# EAGLE board Titan_Servo_v1p01c (EAGLE 9.6.2), part 1 of 2
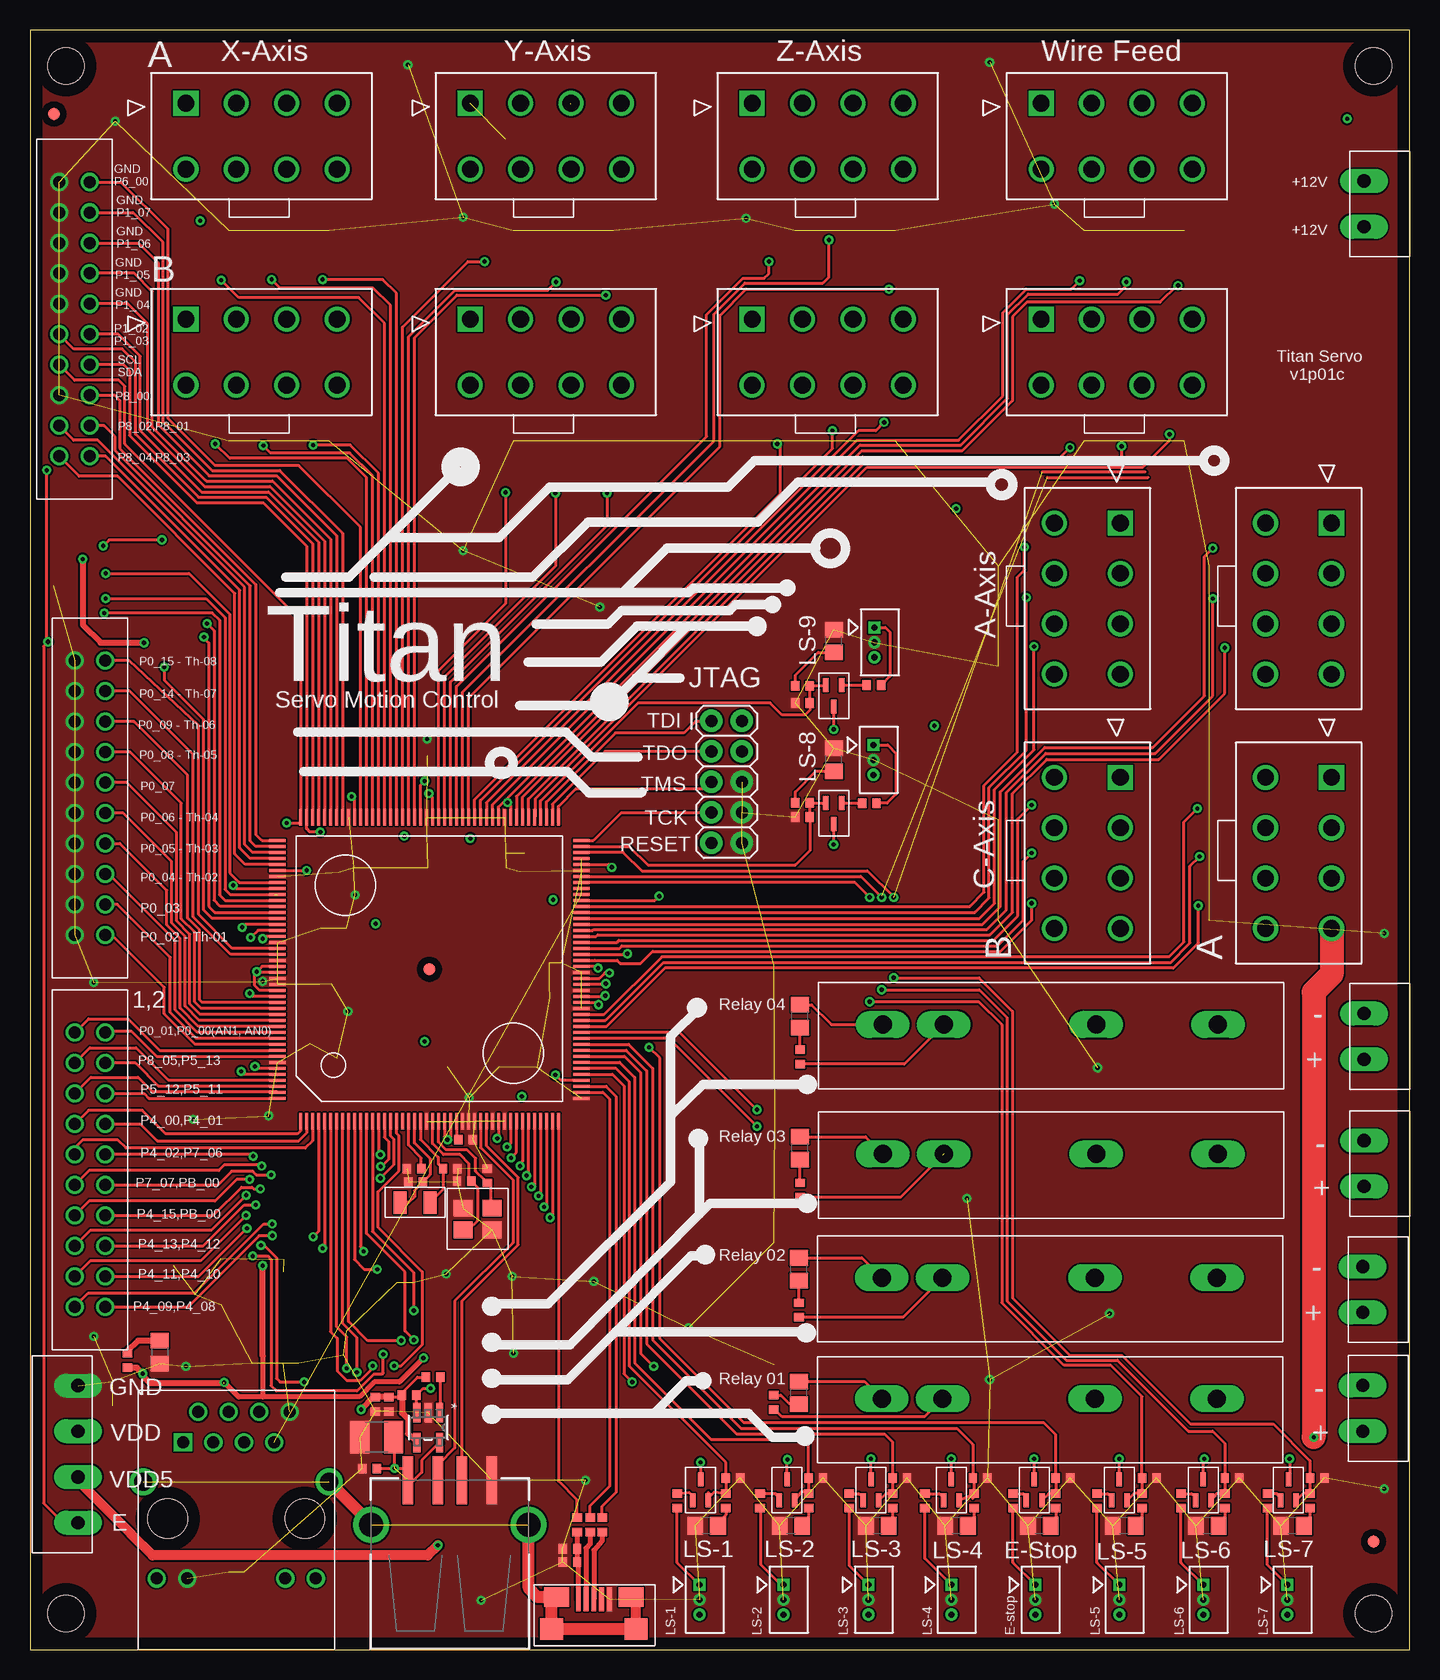
[diagram p0: board, top side]
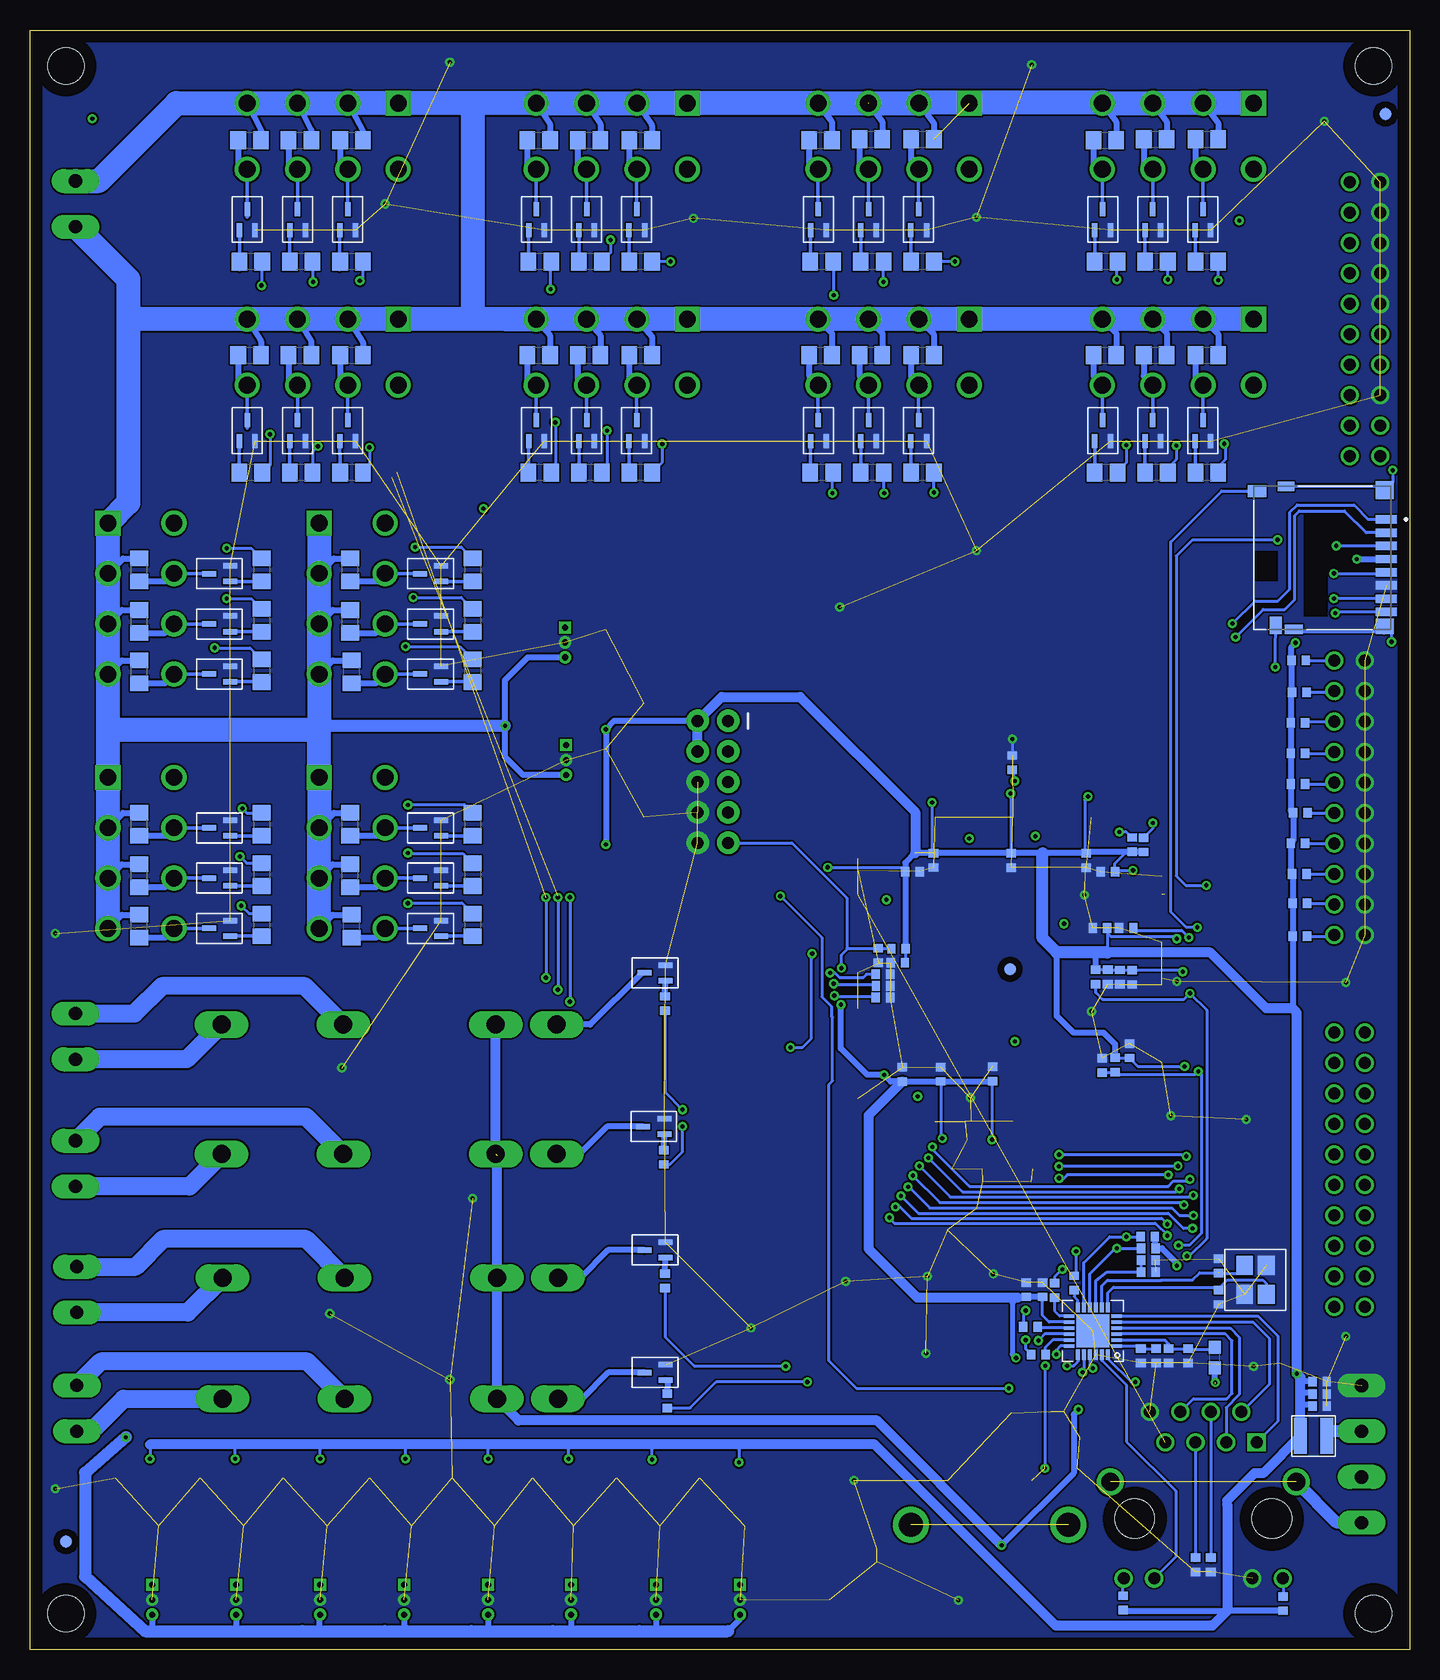
[diagram p1: board, bottom side, seen from below]

Size 115 x 135 mm. Coordinates in mm from the lower left corner, seen from the top.
Outline: 0,0 115,0 115,135 0,135 0,0
Copper layers (1*16): Top 0.035mm / dielectric 1.5mm / Bottom 0.035mm
Design rules "default": minimum track width 6mil, minimum drill 0.35mm, track to track 6mil, track to pad 6mil, pad to pad 6mil, via to via 6mil, smd to smd 6mil, copper to edge 40mil, drill to drill 6mil, minimum pad ring 10mil, minimum via ring 8mil, stop-mask expansion 4mil, vias tented up to drill 0mil, thermal gap 10mil
Holes 3 mm at 3,132 112,132 112,3 3,3

## Footprints (pad centres in the part's own frame; a part is rotated, then mirrored left to right if it is on the bottom)
FIDUCIAL_1MM = smd 1 x 1: 1 0,0
0402 = smd 0.8 x 0.7: P$1 0,0.6; P$2 0,-0.6
C1210 = smd 1.6 x 2.7: 1 -1.4,0; 2 1.4,0
0603 = smd 1.1 x 1: 1 -0.85,0; 2 0.85,0
SD_CARD = smd 0.7 x 1.75: 1 3.2,-5.285; 2 2.1,-5.285; 3 1,-5.285; 4 -0.1,-5.285; 5 -1.2,-5.285; 6 -2.3,-5.285; 7 -3.4,-5.285; 8 -4.5,-5.285 | smd 1 x 1.55: 9 5.575,5.515 | smd 1.45 x 1: 10 -5.625,3.94 | smd 1.5 x 1.5: S1 5.65,-5.16 | smd 1.3 x 1.5: S2 -5.7,-5.16 | smd 0.8 x 1.4: S3 5.975,3.09 | smd 0.8 x 1.5: S4 -5.95,2.44
1X4_3.81MM_PITCH = drill 1.1 pad 2 long: P$1 0,0; P$2 3.81,0; P$3 7.62,0; P$4 11.43,0
2X5 = drill 1 pad 1.88: 1 0,0; 2 0,2.54; 3 2.54,0; 4 2.54,2.54; 5 5.08,0; 6 5.08,2.54; 7 7.62,0; 8 7.62,2.54; 9 10.16,0; 10 10.16,2.54
2_X_10_.1_INCH = drill 1: P$1 -11.43,-1.27; P$2 -11.43,1.27; P$3 -8.89,-1.27; P$4 -8.89,1.27; P$5 -6.35,-1.27; P$6 -6.35,1.27; P$7 -3.81,-1.27; P$8 -3.81,1.27; P$9 -1.27,-1.27; P$10 -1.27,1.27; P$11 1.27,-1.27; P$12 1.27,1.27; P$13 3.81,-1.27; P$14 3.81,1.27; P$15 6.35,-1.27; P$16 6.35,1.27; P$17 8.89,-1.27; P$18 8.89,1.27; P$19 11.43,-1.27; P$20 11.43,1.27
CON_530470310_MOL = drill 0.508 pad 0.838 square: 1 0,0 | drill 0.508 pad 0.838: 2 -1.245,0; 3 -2.489,0
USB_A_SMT = smd 4 x 0.9: D+ 6.7,-1; D- 6.7,1; GND 6.7,-3.5; VBUS 6.7,3.5 | drill 2: SHLD1 3,-6.566; SHLD2 3,6.566
USB_MICRO-B = smd 0.4 x 2: P$1 -1.3,2.475; P$2 -0.65,2.475; P$3 0,2.475; P$4 0.65,2.475; P$5 1.3,2.475 | smd 2.1 x 1.6: P$6 -3.1,2.675; P$7 3.1,2.675 | smd 1.9 x 1.8: P$8 -3.525,0; P$9 3.525,0
2_3.81MM_PITCH = drill 1.1 pad 2 long: P$1 0,0; P$2 3.81,0
CON_39281083 = drill 1.397 pad 1.905 square: 1 12.6,-5.5 | drill 1.397 pad 1.905: 2 8.4,-5.5; 3 4.2,-5.5; 4 0,-5.5; 5 12.6,0; 6 8.4,0; 7 4.2,0; 8 0,0
1008 = smd 3 x 1.1: 1 0,1.1; 2 0,-1.1
0805 = smd 1.3 x 1.5: 1 -0.95,0; 2 0.95,0
RJ45_TH_ELEC = drill 1 square: 1 -4.45,-2.54 | drill 1: 2 -3.18,0; 3 -1.91,-2.54; 4 -0.635,0; 5 0.635,-2.54; 6 1.91,0; 7 3.17,-2.54; 8 4.445,0; 9 -6.63,-13.88; 10 -4.09,-13.88; 11 4.09,-13.88; 12 6.63,-13.88 | drill 1.5: 13 -7.75,-5.84; 14 7.75,-5.84 | hole 3.299: 5.715,-8.89; -5.715,-8.89
QFN-24-M = smd 0.864 x 0.305: 1 -1.968,1.25; 2 -1.968,0.75; 3 -1.968,0.25; 4 -1.968,-0.25; 5 -1.968,-0.75; 6 -1.968,-1.25; 13 1.968,-1.25; 14 1.968,-0.75; 15 1.968,-0.25; 16 1.968,0.25; 17 1.968,0.75; 18 1.968,1.25 | smd 0.305 x 0.864: 7 -1.25,-1.968; 8 -0.75,-1.968; 9 -0.25,-1.968; 10 0.25,-1.968; 11 0.75,-1.968; 12 1.25,-1.968; 19 1.25,1.968; 20 0.75,1.968; 21 0.25,1.968; 22 -0.25,1.968; 23 -0.75,1.968; 24 -1.25,1.968 | smd 2.743 x 2.743: 25 0,0
SOT-23-5 = smd 1.626 x 0.61: 1 -1.245,0.95; 2 -1.245,0; 3 -1.245,-0.95; 4 1.245,-0.95; 5 1.245,0.95
LQFP176_24X24 = smd 1.372 x 0.254: 1 -12.675,10.75; 2 -12.675,10.25; 3 -12.675,9.75; 4 -12.675,9.25; 5 -12.675,8.75; 6 -12.675,8.25; 7 -12.675,7.75; 8 -12.675,7.25; 9 -12.675,6.75; 10 -12.675,6.25; 11 -12.675,5.75; 12 -12.675,5.25; 13 -12.675,4.75; 14 -12.675,4.25; 15 -12.675,3.75; 16 -12.675,3.25; 17 -12.675,2.75; 18 -12.675,2.25; 19 -12.675,1.75; 20 -12.675,1.25; 21 -12.675,0.75; 22 -12.675,0.25; 23 -12.675,-0.25; 24 -12.675,-0.75; 25 -12.675,-1.25; 26 -12.675,-1.75; 27 -12.675,-2.25; 28 -12.675,-2.75; 29 -12.675,-3.25; 30 -12.675,-3.75; 31 -12.675,-4.25; 32 -12.675,-4.75; 33 -12.675,-5.25; 34 -12.675,-5.75; 35 -12.675,-6.25; 36 -12.675,-6.75; 37 -12.675,-7.25; 38 -12.675,-7.75; 39 -12.675,-8.25; 40 -12.675,-8.75; 41 -12.675,-9.25; 42 -12.675,-9.75; 43 -12.675,-10.25; 44 -12.675,-10.75; 89 12.675,-10.75; 90 12.675,-10.25; 91 12.675,-9.75; 92 12.675,-9.25; 93 12.675,-8.75; 94 12.675,-8.25; 95 12.675,-7.75; 96 12.675,-7.25; 97 12.675,-6.75; 98 12.675,-6.25; 99 12.675,-5.75; 100 12.675,-5.25; 101 12.675,-4.75; 102 12.675,-4.25; 103 12.675,-3.75; 104 12.675,-3.25; 105 12.675,-2.75; 106 12.675,-2.25; 107 12.675,-1.75; 108 12.675,-1.25; 109 12.675,-0.75; 110 12.675,-0.25; 111 12.675,0.25; 112 12.675,0.75; 113 12.675,1.25; 114 12.675,1.75; 115 12.675,2.25; 116 12.675,2.75; 117 12.675,3.25; 118 12.675,3.75; 119 12.675,4.25; 120 12.675,4.75; 121 12.675,5.25; 122 12.675,5.75; 123 12.675,6.25; 124 12.675,6.75; 125 12.675,7.25; 126 12.675,7.75; 127 12.675,8.25; 128 12.675,8.75; 129 12.675,9.25; 130 12.675,9.75; 131 12.675,10.25; 132 12.675,10.75 | smd 0.254 x 1.372: 45 -10.75,-12.675; 46 -10.25,-12.675; 47 -9.75,-12.675; 48 -9.25,-12.675; 49 -8.75,-12.675; 50 -8.25,-12.675; 51 -7.75,-12.675; 52 -7.25,-12.675; 53 -6.75,-12.675; 54 -6.25,-12.675; 55 -5.75,-12.675; 56 -5.25,-12.675; 57 -4.75,-12.675; 58 -4.25,-12.675; 59 -3.75,-12.675; 60 -3.25,-12.675; 61 -2.75,-12.675; 62 -2.25,-12.675; 63 -1.75,-12.675; 64 -1.25,-12.675; 65 -0.75,-12.675; 66 -0.25,-12.675; 67 0.25,-12.675; 68 0.75,-12.675; 69 1.25,-12.675; 70 1.75,-12.675; 71 2.25,-12.675; 72 2.75,-12.675; 73 3.25,-12.675; 74 3.75,-12.675; 75 4.25,-12.675; 76 4.75,-12.675; 77 5.25,-12.675; 78 5.75,-12.675; 79 6.25,-12.675; 80 6.75,-12.675; 81 7.25,-12.675; 82 7.75,-12.675; 83 8.25,-12.675; 84 8.75,-12.675; 85 9.25,-12.675; 86 9.75,-12.675; 87 10.25,-12.675; 88 10.75,-12.675; 133 10.75,12.675; 134 10.25,12.675; 135 9.75,12.675; 136 9.25,12.675; 137 8.75,12.675; 138 8.25,12.675; 139 7.75,12.675; 140 7.25,12.675; 141 6.75,12.675; 142 6.25,12.675; 143 5.75,12.675; 144 5.25,12.675; 145 4.75,12.675; 146 4.25,12.675; 147 3.75,12.675; 148 3.25,12.675; 149 2.75,12.675; 150 2.25,12.675; 151 1.75,12.675; 152 1.25,12.675; 153 0.75,12.675; 154 0.25,12.675; 155 -0.25,12.675; 156 -0.75,12.675; 157 -1.25,12.675; 158 -1.75,12.675; 159 -2.25,12.675; 160 -2.75,12.675; 161 -3.25,12.675; 162 -3.75,12.675; 163 -4.25,12.675; 164 -4.75,12.675; 165 -5.25,12.675; 166 -5.75,12.675; 167 -6.25,12.675; 168 -6.75,12.675; 169 -7.25,12.675; 170 -7.75,12.675; 171 -8.25,12.675; 172 -8.75,12.675; 173 -9.25,12.675; 174 -9.75,12.675; 175 -10.25,12.675; 176 -10.75,12.675
SOT323 = smd 0.457 x 1.168: 1 -0.65,-0.876; 2 0.65,-0.876; 3 0,0.876
RELAY_KYOTO_KF0604D = drill 1.5 long: P$1 0,0; P$2 -5.08,0; P$3 -17.78,0; P$4 -27.94,0
SMD_3225 = smd 1.6 x 1.4: 1 -1.2,-0.9; 2 1.2,-0.9; 3 1.2,0.9; 4 -1.2,0.9
SMD_X_2_PADS = smd 1.9 x 1.1: P$1 0,1.25; P$2 0,-1.25

## Placement (x,y rotation side)
AFID1  FIDUCIAL_1MM  [FIDUCIAL_1MM]  112,9 0 top
AFID2  FIDUCIAL_1MM  [FIDUCIAL_1MM]  2,128 0 top
AFID3  FIDUCIAL_1MM  [FIDUCIAL_1MM]  33.3,56.7 0 top
AFID4  FIDUCIAL_1MM  [FIDUCIAL_1MM]  112,9 0 bottom
AFID5  FIDUCIAL_1MM  [FIDUCIAL_1MM]  2,128 0 bottom
AFID6  FIDUCIAL_1MM  [FIDUCIAL_1MM]  33.3,56.7 0 bottom
C1  24pF  [0402]  15.91,31.98 180 bottom
C2  24pF  [0402]  15.91,29.37 0 bottom
C3  100pF  [0402]  21.76,31.46 90 bottom
C4  0.1uF  [0402]  7.5,22.35 90 bottom
C5  10uF  [0402]  7.5,21.3 90 bottom
C6  10uF  [0402]  25.61,48.7 180 bottom
C7  0.1uF  [0402]  7.5,20.3 90 bottom
C8  22uF  [0402]  18.46,24.48 0 bottom
C9  0.1uF  [0402]  20.09,24.48 0 bottom
C10  0.1uF  [0402]  22.4,24.48 0 bottom
C11  2.2uF  [0402]  21.12,24.48 0 bottom
C12  0.1uF  [0402]  16.56,7.07 0 bottom
C13  0.1uF  [0402]  17.84,7.07 0 bottom
C14  22uF  [0402]  31.95,30 180 bottom
C15  0.1uF  [0402]  30.6,30 180 bottom
C16  10uF  [0402]  44.28,57.85 0 bottom
C17  18pF  [0402]  36.2,39.03 270 top
C18  18pF  [0402]  38.13,39.5 180 top
C19  0.1uF  [0402]  25.8,60.15 90 bottom
C20  0.1uF  [0402]  25.16,64.82 90 bottom
C21  1uF  [0402]  25.15,56.06 180 bottom
C22  0.1uF  [0402]  24.15,56.05 180 bottom
C23  10uF  [0402]  29.9,20.45 0 top
C24  0.1uF  [0402]  23.62,60.14 90 bottom
C25  0.1uF  [0402]  23.13,56.04 180 bottom
C26  0.1uF  [0402]  28.8,20.45 0 top
C27  0.1uF  [0402]  23.35,49.91 0 bottom
C28  1uF  [0402]  45,8.4 270 top
C29  0.1uF  [0402]  28.3,15.1 270 top
C30  0.1uF  [0402]  26.97,65.78 180 bottom
C31  100uF_Tant  [C1210]  28.9,17.7 180 top
C32  12pF  [0402]  32.14,38.97 270 top
C33  0.1uF  [0402]  32.02,40.07 270 top
C34  0.1uF  [0402]  33.11,73.92 0 bottom
C35  0.1uF  [0402]  33.2,65.78 180 bottom
C36  0.1uF  [0402]  34.76,47.99 180 bottom
C37  12pF  [0402]  35.03,40.07 90 top
C38  0.1uF  [0402]  39.69,65.79 180 bottom
C39  0.1uF  [0402]  39.09,47.95 180 bottom
C40  0.1uF  [0402]  42.66,57.24 270 bottom
C41  1uF  [0402]  41.44,64.84 90 bottom
C42  0.1uF  [0402]  43.9,54.35 90 bottom
C43  0.1uF  [0402]  42.29,47.94 0 bottom
FB1  FB2_603  [0603]  16.22,24.33 90 bottom
J1  SD_CARD  [SD_CARD]  7.21,91 90 bottom
J2  4-pos  [1X4_3.81MM_PITCH]  4,22 270 top
J3  10-pos  [2X5]  56.8,77.4 270 top
J4  20-pos  [2_X_10_.1_INCH]  5,40 270 top
J5  [CON_530470310_MOL]  70.3,75.4 90 top
J6  USB-A  [USB_A_SMT]  35,7.4 90 top
J7  USB-B-Micro  [USB_MICRO-B]  47,1.7 0 top
J8  [2_X_10_.1_INCH]  3.7,110.9 90 top
J9  2-pos  [2_3.81MM_PITCH]  111.2,118.6 90 top
J10  [CON_530470310_MOL]  70.4,85.2 90 top
J11  [CON_530470310_MOL]  104.8,5.4 90 top
J12  [CON_530470310_MOL]  97.8,5.4 90 top
J13  [CON_39281083]  25.6,123.4 180 top
J14  [CON_39281083]  25.6,105.4 180 top
J15  2-pos  [2_3.81MM_PITCH]  111.2,49.2 90 top
J16  2-pos  [2_3.81MM_PITCH]  111.2,38.6 90 top
J17  [CON_39281083]  49.3,123.4 180 top
J18  [CON_39281083]  49.3,105.4 180 top
J19  [CON_530470310_MOL]  90.8,5.4 90 top
J20  [CON_530470310_MOL]  83.8,5.4 90 top
J21  [CON_39281083]  72.8,123.4 180 top
J22  [CON_39281083]  72.8,105.4 180 top
J23  2-pos  [2_3.81MM_PITCH]  111.1,28.1 90 top
J24  2-pos  [2_3.81MM_PITCH]  111.1,18.2 90 top
J25  [CON_39281083]  103,81.3 90 top
J26  [CON_39281083]  85.4,81.3 90 top
J27  [CON_530470310_MOL]  76.8,5.4 90 top
J28  [CON_530470310_MOL]  69.9,5.4 90 top
J29  [CON_39281083]  103,60.1 90 top
J30  [CON_39281083]  85.4,60.1 90 top
J31  [CON_530470310_MOL]  62.8,5.4 90 top
J32  [CON_530470310_MOL]  55.8,5.4 90 top
J33  [CON_39281083]  96.9,123.4 180 top
J34  [CON_39281083]  96.9,105.4 180 top
J39  [2_X_10_.1_INCH]  5,71 270 top
L1  2.2uH  [1008]  8,17.8 270 bottom
LED1  Green  [0805]  10.8,24.8 270 top
LED3  Green  [0805]  56.4,10.3 180 top
LED4  Green  [0805]  64.2,52.8 90 top
LED5  Green  [0805]  64.2,41.8 90 top
LED6  Green  [0805]  63.44,10.3 180 top
LED7  Green  [0805]  70.64,10.3 180 top
LED8  Green  [0805]  64.1,31.7 90 top
LED9  Green  [0805]  64.1,21.4 90 top
LED10  Green  [0805]  91.2,10.3 180 top
LED11  Green  [0805]  77.24,10.3 180 top
LED12  Green  [0805]  98.14,10.3 180 top
LED13  Green  [0805]  84.14,10.3 180 top
LED14  Green  [0805]  67,74.16 90 top
LED15  Green  [0805]  105.24,10.3 180 top
LED16  Green  [0805]  67,84.06 90 top
R1  6K49  [0402]  21.78,32.46 270 bottom
R2  10K0  [0402]  26.16,56.07 180 bottom
R3  10K0  [0402]  24.54,48.72 180 bottom
R4  1K5  [0402]  21.83,34.41 90 bottom
R5  470R0  [0402]  8.12,24.09 0 top
R6  1K5  [0402]  21.78,33.44 90 bottom
R7  470R0  [0402]  23.89,3.88 0 bottom
R8  470R0  [0402]  10.54,3.83 0 bottom
R9  33R0  [0402]  27.95,30.55 0 bottom
R10  33R0  [0402]  29.6,29.95 0 bottom
R11  33R0  [0402]  30.95,24.6 90 bottom
R12  33R0  [0402]  31.6,26.9 90 bottom
R13  10K0  [0402]  42.58,58.42 90 bottom
R14  1K0  [0402]  22.15,67.08 180 bottom
R15  1K0  [0402]  23.13,67.08 180 bottom
R16  15K0  [0402]  45.6,10.4 0 top
R17  27R0  [0402]  46.7,10.4 0 top
R18  27R0  [0402]  47.7,10.4 0 top
R19  10K0  [0402]  31.6,21.2 270 top
R20  10K0  [0402]  33.6,22.7 270 top
R21  30K0  [0402]  45,7.3 90 top
R22  2K2  [0402]  36.31,42.5 270 top
R23  10K0  [0402]  43.88,55.32 270 bottom
R24  10K0  [0402]  43.89,56.28 270 bottom
R25  100K  [0402]  9.15,59.45 270 bottom
R26  100K  [0402]  9.15,62.2 270 bottom
R27  100K  [0402]  9.2,64.65 270 bottom
R28  2K2  [0402]  53.95,12.4 180 top
R29  470R0  [0402]  62.06,53.84 180 bottom
R30  470R0  [0402]  62.16,41.04 180 bottom
R31  470R0  [0402]  64.2,38.3 0 top
R32  470R0  [0402]  64.2,49.4 0 top
R33  470R0  [0402]  58,12.4 180 top
R34  10K0  [0402]  58.6,14.3 270 top
R35  2K2  [0402]  60.85,12.4 180 top
R36  470R0  [0402]  64.9,12.4 180 top
R37  1k  [0805]  16.9,125.9 0 bottom
R38  33  [0805]  16.9,115.7 180 bottom
R39  33  [0805]  21.1,115.7 180 bottom
R40  33  [0805]  25.3,115.7 180 bottom
R41  1k  [0805]  21.2,125.9 0 bottom
R42  1k  [0805]  25.4,125.8 0 bottom
R43  1k  [0805]  16.9,107.9 0 bottom
R44  33  [0805]  16.9,98.1 180 bottom
R45  33  [0805]  21.1,98.1 180 bottom
R46  33  [0805]  25.3,98.1 180 bottom
R47  1k  [0805]  21.2,107.9 0 bottom
R48  1k  [0805]  25.4,107.9 0 bottom
R49  470R0  [0402]  62.06,30.74 180 bottom
R50  470R0  [0402]  61.86,20.74 180 bottom
R51  470R0  [0402]  62,20.6 0 top
R52  470R0  [0402]  64.1,28.3 0 top
R53  10K0  [0402]  65.5,14.3 270 top
R54  2K2  [0402]  68.3,12.4 180 top
R55  470R0  [0402]  71.9,12.4 180 top
R56  10K0  [0402]  72.5,14.3 270 top
R57  2K2  [0402]  88.95,12.4 180 top
R58  470R0  [0402]  92.7,12.4 180 top
R59  10K0  [0402]  93.3,14.3 270 top
R60  2K2  [0402]  74.6,12.4 180 top
R61  1k  [0805]  40.6,125.9 0 bottom
R62  33  [0805]  40.6,115.7 180 bottom
R63  33  [0805]  44.8,115.7 180 bottom
R64  33  [0805]  49,115.7 180 bottom
R65  1k  [0805]  44.9,125.9 0 bottom
R66  1k  [0805]  49.1,125.8 0 bottom
R67  1k  [0805]  40.6,107.9 0 bottom
R68  33  [0805]  40.6,98.1 180 bottom
R69  33  [0805]  44.8,98.1 180 bottom
R70  33  [0805]  49,98.1 180 bottom
R71  1k  [0805]  44.9,107.9 0 bottom
R72  1k  [0805]  49.1,107.9 0 bottom
R73  470R0  [0402]  78.7,12.4 180 top
R74  10K0  [0402]  79.2,14.3 270 top
R75  2K2  [0402]  95.95,12.4 180 top
R76  470R0  [0402]  99.6,12.4 180 top
R77  10K0  [0402]  100.2,14.3 270 top
R78  2K2  [0402]  81.95,12.4 180 top
R79  470R0  [0402]  85.5,12.4 180 top
R80  10K0  [0402]  86.1,14.3 270 top
R81  2K2  [0402]  69.96,70.55 270 top
R82  470R0  [0402]  64.4,70.6 90 top
R83  10K0  [0402]  64.4,69.4 90 top
R84  2K2  [0402]  103.15,12.4 180 top
R85  1k  [0805]  64.1,125.8 0 bottom
R86  33  [0805]  64.1,115.7 180 bottom
R87  33  [0805]  68.3,115.7 180 bottom
R88  33  [0805]  72.5,115.7 180 bottom
R89  1k  [0805]  68.4,125.8 0 bottom
R90  1k  [0805]  72.6,125.8 0 bottom
R91  1k  [0805]  64.1,107.9 0 bottom
R92  33  [0805]  64.1,98.1 180 bottom
R93  33  [0805]  68.3,98.1 180 bottom
R94  33  [0805]  72.5,98.1 180 bottom
R95  1k  [0805]  68.4,107.9 0 bottom
R96  1k  [0805]  72.6,107.9 0 bottom
R97  470R0  [0402]  106.7,12.4 180 top
R98  10K0  [0402]  107.3,14.3 270 top
R99  2K2  [0402]  70.36,80.4 270 top
R100  470R0  [0402]  64.4,80.35 90 top
R101  10K0  [0402]  64.4,78.9 90 top
R102  100K  [0402]  9.3,67.2 270 bottom
R103  100K  [0402]  9.1,69.75 270 bottom
R104  100K  [0402]  9.3,72.15 270 bottom
R105  100K  [0402]  9.3,74.7 270 bottom
R106  100K  [0402]  9.3,77.25 270 bottom
R107  100K  [0402]  9.2,79.8 270 bottom
R108  100K  [0402]  9.25,82.45 270 bottom
R109  1k  [0805]  105.9,90 90 bottom
R110  33  [0805]  95.7,90 270 bottom
R111  33  [0805]  95.7,85.8 270 bottom
R112  33  [0805]  95.7,81.6 270 bottom
R113  1k  [0805]  105.9,85.7 90 bottom
R114  1k  [0805]  105.9,81.5 90 bottom
R115  1k  [0805]  88.3,90 90 bottom
R116  33  [0805]  78.1,90 270 bottom
R117  33  [0805]  78.1,85.8 270 bottom
R118  33  [0805]  78.1,81.6 270 bottom
R119  1k  [0805]  88.3,85.7 90 bottom
R120  1k  [0805]  88.2,81.5 90 bottom
R133  1k  [0805]  105.9,68.8 90 bottom
R134  33  [0805]  95.7,68.8 270 bottom
R135  33  [0805]  95.7,64.6 270 bottom
R136  33  [0805]  95.7,60.4 270 bottom
R137  1k  [0805]  105.9,64.5 90 bottom
R138  1k  [0805]  105.9,60.3 90 bottom
R139  1k  [0805]  88.3,68.8 90 bottom
R140  33  [0805]  78.1,68.8 270 bottom
R141  33  [0805]  78.1,64.6 270 bottom
R142  33  [0805]  78.1,60.4 270 bottom
R143  1k  [0805]  88.3,64.5 90 bottom
R144  1k  [0805]  88.2,60.3 90 bottom
R157  1k  [0805]  88.2,125.8 0 bottom
R158  33  [0805]  88.2,115.7 180 bottom
R159  33  [0805]  92.4,115.7 180 bottom
R160  33  [0805]  96.6,115.7 180 bottom
R161  1k  [0805]  92.5,125.8 0 bottom
R162  1k  [0805]  96.7,125.8 0 bottom
R163  1k  [0805]  88.2,107.9 0 bottom
R164  33  [0805]  88.2,98.1 180 bottom
R165  33  [0805]  92.4,98.1 180 bottom
R166  33  [0805]  96.6,98.1 180 bottom
R167  1k  [0805]  92.5,107.9 0 bottom
R168  1k  [0805]  96.7,107.9 0 bottom
RJ1  RJ45  [RJ45_TH_ELEC]  17.2,19.8 0 top
U1  KSZ8081_QFN_24  [QFN-24-M]  26.4,26.55 180 bottom
U2  AP2151DWG-7  [SOT-23-5]  33.2,18.5 270 top
U3  S7G2LQFP176  [LQFP176_24X24]  33.3,56.7 90 top
U5  NPN  [SOT323]  55.91,13.3 0 top
U6  NPN  [SOT323]  62.9,56.4 90 bottom
U7  NPN  [SOT323]  63,43.6 90 bottom
U8  NPN  [SOT323]  63.11,13.3 0 top
U9  NPN  [SOT323]  70.11,13.3 0 top
U10  NPN  [SOT323]  17.22,119.2 0 bottom
U11  NPN  [SOT323]  21.4,119.2 0 bottom
U12  NPN  [SOT323]  25.58,119.2 0 bottom
U13  NPN  [SOT323]  17.22,101.6 0 bottom
U14  NPN  [SOT323]  21.4,101.6 0 bottom
U15  NPN  [SOT323]  25.58,101.6 0 bottom
U16  NPN  [SOT323]  62.9,33.3 90 bottom
U17  NPN  [SOT323]  62.9,23.1 90 bottom
U18  NPN  [SOT323]  90.81,13.3 0 top
U19  NPN  [SOT323]  76.81,13.3 0 top
U20  NPN  [SOT323]  97.81,13.3 0 top
U21  NPN  [SOT323]  83.71,13.3 0 top
U22  NPN  [SOT323]  40.92,119.2 0 bottom
U23  NPN  [SOT323]  45.1,119.2 0 bottom
U24  NPN  [SOT323]  49.28,119.2 0 bottom
U25  NPN  [SOT323]  40.92,101.6 0 bottom
U26  NPN  [SOT323]  45.1,101.6 0 bottom
U27  NPN  [SOT323]  49.28,101.6 0 bottom
U28  NPN  [SOT323]  67,69.7 180 top
U29  NPN  [SOT323]  104.91,13.3 0 top
U30  NPN  [SOT323]  67,79.5 180 top
U34  NPN  [SOT323]  64.42,119.2 0 bottom
U35  NPN  [SOT323]  68.6,119.2 0 bottom
U36  NPN  [SOT323]  72.78,119.2 0 bottom
U37  NPN  [SOT323]  64.42,101.6 0 bottom
U38  NPN  [SOT323]  68.6,101.6 0 bottom
U39  NPN  [SOT323]  72.78,101.6 0 bottom
U46  NPN  [SOT323]  99.2,89.68 90 bottom
U47  NPN  [SOT323]  99.2,85.5 90 bottom
U48  NPN  [SOT323]  99.2,81.32 90 bottom
U49  NPN  [SOT323]  81.6,89.68 90 bottom
U50  NPN  [SOT323]  81.6,85.5 90 bottom
U51  NPN  [SOT323]  81.6,81.32 90 bottom
U58  NPN  [SOT323]  99.2,68.48 90 bottom
U59  NPN  [SOT323]  99.2,64.3 90 bottom
U60  NPN  [SOT323]  99.2,60.12 90 bottom
U61  NPN  [SOT323]  81.6,68.48 90 bottom
U62  NPN  [SOT323]  81.6,64.3 90 bottom
U63  NPN  [SOT323]  81.6,60.12 90 bottom
U70  NPN  [SOT323]  88.52,119.2 0 bottom
U71  NPN  [SOT323]  92.7,119.2 0 bottom
U72  NPN  [SOT323]  96.88,119.2 0 bottom
U73  NPN  [SOT323]  88.52,101.6 0 bottom
U74  NPN  [SOT323]  92.7,101.6 0 bottom
U75  NPN  [SOT323]  96.88,101.6 0 bottom
U$1  RELAY_KYOTO_KF0604D  [RELAY_KYOTO_KF0604D]  71.1,52.1 180 top
U$2  RELAY_KYOTO_KF0604D  [RELAY_KYOTO_KF0604D]  71.1,41.3 180 top
U$7  RELAY_KYOTO_KF0604D  [RELAY_KYOTO_KF0604D]  71,31 180 top
U$8  RELAY_KYOTO_KF0604D  [RELAY_KYOTO_KF0604D]  71,20.9 180 top
X1  25MHz  [SMD_3225]  12.85,30.81 270 bottom
X2  24MHz  [SMD_3225]  37.31,35.89 0 top
X3  32.768KHz  [SMD_X_2_PADS]  32.1,37.26 90 top

## Library data of the parts
AFID1-AFID6 R25-R30 R35 R37-R50 R54 R57 R60-R72 R75 R78 R81 R84-R96 R99 R102-R120 R133-R144 R157-R168 U$1 U$2 U$7 U$8 = 3D_MIG_Controller
C1 C2 = 3D_MIG_Controller; PARTNO: CC0402GRNPO9BN240
C3 = 3D_MIG_Controller; PARTNO: CL05C101JB5NNNC
C4 C7 C9 C10 C12 C13 C15 C19 C20 C22 C24-C27 C29 C30 C33-C36 C38-C40 C42 C43 = 3D_MIG_Controller; PARTNO: CL05F104ZO5NNNC
C5 C6 C16 C23 = 3D_MIG_Controller; PARTNO: CL05A106MP8NUB8
C8 C14 = 3D_MIG_Controller; PARTNO: CL05A226MQ5N6J8
C11 = 3D_MIG_Controller; PARTNO: GRM155C81C225ME15D
C17 C18 = 3D_MIG_Controller; PARTNO: UMK105CG180JV-F
C21 C28 C41 = 3D_MIG_Controller; PARTNO: CL05A105KO5NNNC
C31 = 3D_MIG_Controller; PARTNO: TLJT107M010R0900
C32 C37 = 3D_MIG_Controller; PARTNO: CL05C120JB5NNNC
FB1 = 3D_MIG_Controller; PARTNO: BLM18PG121SN1D
J1 = 3D_MIG_Controller; MF: Amphenol ICC; PARTNO: 114-00841-68; VID: Digikey; VP: 114-00841-68-1-ND; VURL: https://www.digikey.ae/product-detail/en/amphenol-icc-commercial-products/114-00841-68/114-00841-68-1-ND/2187101?utm_source=snapeda&utm_medium=aggregator&utm_campaign=symbol
J2 = 3D_MIG_Controller; PARTNO: 691322310004
J3 = 3D_MIG_Controller; PARTNO: PH2RA-10-UA
J4 J8 J39 = 3D_MIG_Controller; PARTNO: 67996-420HLF
J5 J10-J12 J19 J20 J27 J28 J31 J32 = 3D_MIG_Controller; COPYRIGHT: Copyright (C) 2022 Ultra Librarian. All rights reserved.; MANUFACTURER_PART_NUMBER: 530470310; MFR_NAME: Molex Connector Corporation
J6 = 3D_MIG_Controller; NOZZLE: CN400; PARTNO: 87583-3010RPALF
J7 = 3D_MIG_Controller; PARTNO: 10118192-0002LF
J9 J15 J16 J23 J24 = 3D_MIG_Controller; PARTNO: 691322310002
J13 J14 J17 J18 J21 J22 J25 J26 J29 J30 J33 J34 = 3D_MIG_Controller; COPYRIGHT: Copyright (C) 2022 Ultra Librarian. All rights reserved.; MANUFACTURER_PART_NUMBER: 39281083; MFR_NAME: Molex Connector Corporation
L1 = 3D_MIG_Controller; PARTNO: LQM2HPN2R2MG0L
LED1 LED3-LED16 = 3D_MIG_Controller; PARTNO: LG R971-KN-1
R1 = 3D_MIG_Controller; PARTNO: RMCF0402FT6K49
R2 R3 R13 R19 R20 R23 R24 R34 R53 R56 R59 R74 R77 R80 R83 R98 R101 = 3D_MIG_Controller; PARTNO: RMCF0402JT10K0
R4 R6 = 3D_MIG_Controller; PARTNO: RMCF0402JT1K50
R5 R7 R8 R31-R33 R36 R51 R52 R55 R58 R73 R76 R79 R82 R97 R100 = 3D_MIG_Controller; PARTNO: RMCF0402JT470R
R9-R12 = 3D_MIG_Controller; PARTNO: RMCF0402JT33R0
R14 R15 = 3D_MIG_Controller; PARTNO: CRG0402J1K0
R16 = 3D_MIG_Controller; PARTNO: RMCF0402JT15K0
R17 R18 = 3D_MIG_Controller; PARTNO: RMCF0402JT27R0
R21 = 3D_MIG_Controller; PARTNO: RC0402JR-0730KL
R22 = 3D_MIG_Controller; PARTNO: RMCF0402JT2K20
RJ1 = 3D_MIG_Controller; MAN: Shanghai YDS Tech; PARTNO: 13F-64GYD2PL2NL; VENDOR: lcsc.com
U1 = 3D_MIG_Controller; PARTNO: KSZ8081RNACA; VENDOR: Micrel
U2 = 3D_MIG_Controller; PARTNO: AP2151WG-7
U3 = 3D_MIG_Controller; PARTNO: R7FS7G27H3A01CFC#AA0
U5-U30 U34-U39 U46-U51 U58-U63 U70-U75 = 3D_MIG_Controller; PARTNO: BC846BW_NPN
X1 = 3D_MIG_Controller; PARTNO: FA-238 25.0000MB-B3
X2 = 3D_MIG_Controller; PARTNO: FA-238 24.0000MB-C3
X3 = 3D_MIG_Controller; PARTNO: ABS07-32.768KHZ-T

## Nets
A_A_DIR: R111.1 U3.73
A_A_ENABLE: R112.1 U3.72
A_A_HLFB_OUT: J25.5
A_A_MI_DIR: J25.7 R113.1 U47.3
A_A_MI_ENABLE: J25.8 R114.1 U48.3
A_A_MI_STEP: J25.6 R109.1 U46.3
A_A_STEP: R110.1 U3.74
A_B_DIR: R117.1 U3.76
A_B_ENABLE: R118.1 U3.75
A_B_HLFB_OUT: J26.5
A_B_MI_DIR: J26.7 R119.1 U50.3
A_B_MI_ENABLE: J26.8 R120.1 U51.3
A_B_MI_STEP: J26.6 R115.1 U49.3
A_B_STEP: R116.1 U3.77
B_MI_DIR: J34.7 R167.1 U74.3
C58: C12.P$1 RJ1.4
C60: C13.P$1 RJ1.5
C_A_DIR: R135.1 U3.58
C_A_ENABLE: R136.1 U3.57
C_A_HLFB_OUT: J29.5
C_A_MI_DIR: J29.7 R137.1 U59.3
C_A_MI_ENABLE: J29.8 R138.1 U60.3
C_A_MI_STEP: J29.6 R133.1 U58.3
C_A_STEP: R134.1 U3.59
C_B_DIR: R141.1 U3.70
C_B_ENABLE: R142.1 U3.68
C_B_HLFB_OUT: J30.5
C_B_MI_DIR: J30.7 R143.1 U62.3
C_B_MI_ENABLE: J30.8 R144.1 U63.3
C_B_MI_STEP: J30.6 R139.1 U61.3
C_B_STEP: R140.1 U3.71
CRS_DV: R12.P$2 U1.15
D+: J7.P$3 R18.P$2
D-: J7.P$2 R17.P$2
ESTOP: R79.P$2 R80.P$2 U3.69 U21.2
ESTOP_RET: J20.1 R78.P$1
ETH: U1.16 U3.9
ETH_CRS_DV: R12.P$1 U3.13
ETH_IRQ14: R2.P$1 U1.18 U3.159
ETH_MDC: R4.P$1 U1.11 U3.4
ETH_MDIO: R6.P$1 U1.10 U3.5
ETH_RESET: C6.P$1 R3.P$1 U1.24 U3.172
ETH_RX_ER: R11.P$1 U3.12
ETH_RXD0: R10.P$1 U3.10
ETH_RXD1: R9.P$1 U3.11
ETH_TXD0: U1.20 U3.8
ETH_TXD1: U1.21 U3.7
ETH_TXD_EN: U1.19 U3.6
GND: C1.P$2 C2.P$2 C3.P$2 C4.P$2 C5.P$2 C6.P$2 C7.P$2 C8.P$2 C9.P$2 C10.P$2 C11.P$2 C12.P$2 C13.P$2 C14.P$2 C15.P$2 C16.P$2 C17.P$2 C18.P$2 C19.P$1 C20.P$1 C21.P$1 C22.P$1 C23.P$2 C24.P$1 C25.P$1 C26.P$2 C27.P$1 C28.P$2 C29.P$2 C30.P$1 C31.2 C32.P$2 C33.P$2 C34.P$1 C35.P$1 C36.P$2 C37.P$2 C38.P$1 C39.P$2 C40.P$2 C41.P$2 C42.P$2 C43.P$1 J1.6 J2.P$1 J3.6 J3.8 J3.10 J5.2 J6.GND J7.P$5 J8.P$6 J8.P$12 J8.P$14 J8.P$16 J8.P$18 J8.P$20 J10.2 J11.2 J12.2 J19.2 J20.2 J27.2 J28.2 J31.2 J32.2 J39.P$1 J39.P$3 J39.P$5 J39.P$7 J39.P$9 J39.P$11 J39.P$13 J39.P$15 J39.P$17 J39.P$19 LED1.2 LED3.2 LED6.2 LED7.2 LED10.2 LED11.2 LED12.2 LED13.2 LED14.2 LED15.2 LED16.2 R1.P$1 R21.P$1 R22.P$1 R23.P$1 R24.P$1 R34.P$1 R53.P$1 R56.P$1 R59.P$1 R74.P$1 R77.P$1 R80.P$1 R83.P$1 R98.P$1 R101.P$1 RJ1.8 RJ1.10 U1.22 U1.25 U2.2 U3.22 U3.28 U3.29 U3.30 U3.33 U3.35 U3.45 U3.60 U3.63 U3.66 U3.83 U3.98 U3.111 U3.124 U3.139 U3.150 U3.153 U3.156 U3.157 U3.170 U6.2 U7.2 U10.2 U11.2 U12.2 U13.2 U14.2 U15.2 U16.2 U17.2 U22.2 U23.2 U24.2 U25.2 U26.2 U27.2 U34.2 U35.2 U36.2 U37.2 U38.2 U39.2 U46.2 U47.2 U48.2 U49.2 U50.2 U51.2 U58.2 U59.2 U60.2 U61.2 U62.2 U63.2 U70.2 U71.2 U72.2 U73.2 U74.2 U75.2 X1.2 X1.4 X2.2 X2.4
GNDE: J1.S1 J1.S2 J1.S3 J1.S4 J2.P$4 J6.SHLD1 J6.SHLD2 J7.P$6 J7.P$7 J7.P$8 J7.P$9 RJ1.13 RJ1.14
ID: J7.P$4
IIC_1_SCL: J8.P$8 R14.P$2 U3.132
IIC_1_SDA: J8.P$7 R15.P$2 U3.131
LED1/SPEED: RJ1.11 U1.23
LS_01: R33.P$2 R34.P$2 U3.50 U5.2
LS_01_RET: J32.1 R28.P$1
LS_02: R36.P$2 R53.P$2 U3.51 U8.2
LS_02_RET: J31.1 R35.P$1
LS_03: R55.P$2 R56.P$2 U3.53 U9.2
LS_03_RET: J28.1 R54.P$1
LS_04: R73.P$2 R74.P$2 U3.54 U19.2
LS_04_RET: J27.1 R60.P$1
LS_05: R58.P$2 R59.P$2 U3.81 U18.2
LS_05_RET: J19.1 R57.P$1
LS_06: R76.P$2 R77.P$2 U3.82 U20.2
LS_06_RET: J12.1 R75.P$1
LS_07: R97.P$2 R98.P$2 U3.86 U29.2
LS_07_RET: J11.1 R84.P$1
LS_08: R82.P$2 R83.P$2 U3.87 U28.2
LS_08_RET: J5.1 R81.P$1
LS_09: R100.P$2 R101.P$2 U3.92 U30.2
LS_09_RET: J10.1 R99.P$1
N$1: C24.P$2 U3.148
N$3: LED1.1 R5.P$1
N$4: C33.P$1 U3.19
N$5: C42.P$1 U3.62
N$6: R23.P$2 U3.64
N$7: R24.P$2 U3.65
N$8: R22.P$2 U3.27
N$10: R28.P$2 U5.1
N$11: LED3.1 R33.P$1
N$12: R35.P$2 U8.1
N$13: LED6.1 R36.P$1
N$14: R39.2 U11.1
N$15: R40.2 U12.1
N$16: R38.2 U10.1
N$17: R45.2 U14.1
N$18: R46.2 U15.1
N$19: R44.2 U13.1
N$20: R29.P$2 U6.1
N$21: LED4.2 U6.3 U$1.P$1
N$22: R30.P$2 U7.1
N$23: LED5.2 U7.3 U$2.P$1
N$24: LED5.1 R31.P$1
N$25: LED4.1 R32.P$1
N$26: R63.2 U23.1
N$27: R64.2 U24.1
N$28: R62.2 U22.1
N$29: R69.2 U26.1
N$30: R70.2 U27.1
N$31: R68.2 U25.1
N$32: R54.P$2 U9.1
N$33: LED7.1 R55.P$1
N$34: R57.P$2 U18.1
N$35: LED10.1 R58.P$1
N$36: R60.P$2 U19.1
N$37: LED11.1 R73.P$1
N$38: R87.2 U35.1
N$39: R88.2 U36.1
N$40: R86.2 U34.1
N$41: R93.2 U38.1
N$42: R94.2 U39.1
N$43: R92.2 U37.1
N$44: R49.P$2 U16.1
N$45: LED8.2 U16.3 U$7.P$1
N$46: R50.P$2 U17.1
N$47: LED9.2 U17.3 U$8.P$1
N$48: LED9.1 R51.P$1
N$49: LED8.1 R52.P$1
N$50: R111.2 U47.1
N$51: R112.2 U48.1
N$52: R110.2 U46.1
N$53: R117.2 U50.1
N$54: R118.2 U51.1
N$55: R116.2 U49.1
N$56: R75.P$2 U20.1
N$57: LED12.1 R76.P$1
N$58: R78.P$2 U21.1
N$59: LED13.1 R79.P$1
N$60: R81.P$2 U28.1
N$61: LED14.1 R82.P$1
N$62: R135.2 U59.1
N$63: R136.2 U60.1
N$64: R134.2 U58.1
N$65: R141.2 U62.1
N$66: R142.2 U63.1
N$67: R140.2 U61.1
N$68: R84.P$2 U29.1
N$69: LED15.1 R97.P$1
N$70: R99.P$2 U30.1
N$71: LED16.1 R100.P$1
N$74: R159.2 U71.1
N$75: R160.2 U72.1
N$76: R158.2 U70.1
N$77: R165.2 U74.1
N$78: R166.2 U75.1
N$79: R164.2 U73.1
NC: RJ1.7 U3.79 U3.80 U3.85
P0_00: J4.P$2 U3.169
P0_01: J4.P$1 U3.168
P0_02: J39.P$20 R25.P$1 U3.167
P0_03: J39.P$18 R26.P$1 U3.166
P0_04: J39.P$16 R27.P$1 U3.165
P0_05: J39.P$14 R102.P$1 U3.164
P0_06: J39.P$12 R103.P$1 U3.163
P0_07: J39.P$10 R104.P$1 U3.162
P0_08: J39.P$8 R105.P$1 U3.161
P0_09: J39.P$6 R106.P$1 U3.160
P0_14: J39.P$4 R107.P$1 U3.152
P0_15: J39.P$2 R108.P$1 U3.151
P1_02: J8.P$10 U3.130
P1_03: J8.P$9 U3.129
P1_04: J8.P$11 U3.128
P1_05: J8.P$13 U3.127
P1_06: J8.P$15 U3.126
P1_07: J8.P$17 U3.125
P4_00: J4.P$7 U3.1
P4_01: J4.P$8 U3.2
P4_02: J4.P$9 U3.3
P4_08: J4.P$20 U3.43
P4_09: J4.P$19 U3.42
P4_10: J4.P$18 U3.41
P4_11: J4.P$17 U3.40
P4_12: J4.P$16 U3.39
P4_13: J4.P$15 U3.38
P4_14: J4.P$14 U3.37
P4_15: J4.P$13 U3.36
P5_11: J4.P$6 U3.176
P5_12: J4.P$5 U3.175
P5_13: J4.P$4 U3.174
P6_00: J8.P$19 U3.122
P7_06: J4.P$10 U3.14
P7_07: J4.P$11 U3.15
P8_00: J8.P$5 U3.133
P8_01: J8.P$3 U3.134
P8_02: J8.P$4 U3.135
P8_03: J8.P$1 U3.136
P8_04: J8.P$2 U3.137
P8_05: J4.P$3 U3.173
PB_00: J4.P$12 U3.16
R51: R7.P$1 RJ1.12
R52: R8.P$1 RJ1.9
RELAY_1: R29.P$1 U3.56
RELAY_2: R30.P$1 U3.55
RELAY_3: R49.P$1 U3.52
RELAY_4: R50.P$1 U3.49
RESET: C16.P$1 J3.9 R13.P$1 U3.67
REXT: C3.P$1 R1.P$2 U1.9
RO_NEG_1: J15.P$2 U$1.P$3
RO_NEG_2: J16.P$2 U$2.P$3
RO_NEG_3: J23.P$2 U$7.P$3
RO_NEG_4: J24.P$2 U$8.P$3
RO_POS_1: J15.P$1 U$1.P$4
RO_POS_2: J16.P$1 U$2.P$4
RO_POS_3: J23.P$1 U$7.P$4
RO_POS_4: J24.P$1 U$8.P$4
RXD0: R10.P$2 U1.13
RXD1: R9.P$2 U1.12
RXER: R11.P$2 U1.17
RXM: RJ1.6 U1.3
RXP: RJ1.3 U1.4
SD1_CD: J1.10 U3.146
SD1_CLK: J1.5 U3.140
SD1_CMD: J1.3 U3.141
SD1_DAT0: J1.7 U3.142
SD1_DAT1: J1.8 U3.143
SD1_DAT2: J1.1 U3.144
SD1_DAT3: J1.2 U3.145
SD1_WP: J1.9 U3.147
TCK: J3.7 U3.88
TDI: J3.1 U3.91
TDO: J3.3 U3.90
TMS: J3.5 U3.89
TXM: RJ1.2 U1.5
TXP: RJ1.1 U1.6
USB_N: R17.P$1 U3.46
USB_P: R18.P$1 U3.47
USB_VBUS_B: R16.P$1 U3.44
USBHS_FAULT: R19.P$1 U2.3 U3.78
USBHS_N: J6.D- U3.31
USBHS_P: J6.D+ U3.32
USBHS_VBUS: C29.P$1 C31.1 J6.VBUS U2.5 U3.17
USBHS_VBUSEN: R20.P$1 U2.1
VBUS: C28.P$1 J7.P$1 R16.P$2 R21.P$2
VCL_F(FLASH): C34.P$2 U3.112
VDD: C4.P$1 C5.P$1 C7.P$1 C14.P$1 C15.P$1 C19.P$2 C20.P$2 C21.P$2 C22.P$2 C25.P$2 C27.P$2 C30.P$2 C35.P$2 C36.P$1 C38.P$2 C39.P$1 C40.P$1 C41.P$1 C43.P$2 FB1.1 J1.4 J3.2 J3.4 L1.2 R2.P$2 R3.P$2 R4.P$2 R5.P$2 R6.P$2 R7.P$2 R8.P$2 R13.P$2 R14.P$1 R15.P$1 R25.P$2 R26.P$2 R27.P$2 R102.P$2 R103.P$2 R104.P$2 R105.P$2 R106.P$2 R107.P$2 R108.P$2 U1.14 U3.25 U3.26 U3.34 U3.48 U3.61 U3.84 U3.97 U3.110 U3.123 U3.138 U3.149 U3.154 U3.155 U3.158 U3.171 U5.3 U8.3 U9.3 U18.3 U19.3 U20.3 U21.3 U28.3 U29.3 U30.3
VDD5: C23.P$1 C26.P$1 J2.P$3 R19.P$2 R20.P$2 R31.P$2 R32.P$2 R51.P$2 R52.P$2 U2.4 U$1.P$2 U$2.P$2 U$7.P$2 U$8.P$2
VDD12: J5.3 J9.P$1 J9.P$2 J10.3 J11.3 J12.3 J13.1 J13.2 J13.3 J13.4 J14.1 J14.2 J14.3 J14.4 J17.1 J17.2 J17.3 J17.4 J18.1 J18.2 J18.3 J18.4 J19.3 J20.3 J21.1 J21.2 J21.3 J21.4 J22.1 J22.2 J22.3 J22.4 J25.1 J25.2 J25.3 J25.4 J26.1 J26.2 J26.3 J26.4 J27.3 J28.3 J29.1 J29.2 J29.3 J29.4 J30.1 J30.2 J30.3 J30.4 J31.3 J32.3 J33.1 J33.2 J33.3 J33.4 J34.1 J34.2 J34.3 J34.4 R37.2 R41.2 R42.2 R43.2 R47.2 R48.2 R61.2 R65.2 R66.2 R67.2 R71.2 R72.2 R85.2 R89.2 R90.2 R91.2 R95.2 R96.2 R109.2 R113.2 R114.2 R115.2 R119.2 R120.2 R133.2 R137.2 R138.2 R139.2 R143.2 R144.2 R157.2 R161.2 R162.2 R163.2 R167.2 R168.2
VDD_1.2: C10.P$1 C11.P$1 U1.1
VDD_ENET1: C8.P$1 C9.P$1 FB1.2 U1.2
VDDIN: J2.P$2 L1.1
WF_A_DIR: R159.1 U3.99
WF_A_ENABLE: R160.1 U3.96
WF_A_HLFB_OUT: J33.5
WF_A_MI_DIR: J33.7 R161.1 U71.3
WF_A_MI_ENABLE: J33.8 R162.1 U72.3
WF_A_MI_STEP: J33.6 R157.1 U70.3
WF_A_STEP: R158.1 U3.100
WF_B_DIR: R165.1 U3.94
WF_B_ENABLE: R166.1 U3.93
WF_B_HLFB_OUT: J34.5
WF_B_MI_ENABLE: J34.8 R168.1 U75.3
WF_B_MI_STEP: J34.6 R163.1 U73.3
WF_B_STEP: R164.1 U3.95
X_A_DIR: R39.1 U3.117
X_A_ENABLE: R40.1 U3.116
X_A_HLFB_OUT: J13.5
X_A_MI_DIR: J13.7 R41.1 U11.3
X_A_MI_ENABLE: J13.8 R42.1 U12.3
X_A_MI_STEP: J13.6 R37.1 U10.3
X_A_STEP: R38.1 U3.118
X_B_DIR: R45.1 U3.120
X_B_ENABLE: R46.1 U3.119
X_B_HLFB_OUT: J14.5
X_B_MI_DIR: J14.7 R47.1 U14.3
X_B_MI_ENABLE: J14.8 R48.1 U15.3
X_B_MI_STEP: J14.6 R43.1 U13.3
X_B_STEP: R44.1 U3.121
XCIN: C32.P$1 U3.20 X3.P$1
XCOUT: C37.P$1 U3.21 X3.P$2
XII: C1.P$1 U1.8 X1.1
XOO: C2.P$1 U1.7 X1.3
XTAL1: C17.P$1 U3.23 X2.1
XTAL2: C18.P$1 U3.24 X2.3
Y_A_DIR: R63.1 U3.114
Y_A_ENABLE: R64.1 U3.113
Y_A_HLFB_OUT: J17.5
Y_A_MI_DIR: J17.7 R65.1 U23.3
Y_A_MI_ENABLE: J17.8 R66.1 U24.3
Y_A_MI_STEP: J17.6 R61.1 U22.3
Y_A_STEP: R62.1 U3.115
Y_B_DIR: R69.1 U3.108
Y_B_ENABLE: R70.1 U3.107
Y_B_HLFB_OUT: J18.5
Y_B_MI_DIR: J18.7 R71.1 U26.3
Y_B_MI_ENABLE: J18.8 R72.1 U27.3
Y_B_MI_STEP: J18.6 R67.1 U25.3
Y_B_STEP: R68.1 U3.109
Z_A_DIR: R87.1 U3.105
Z_A_ENABLE: R88.1 U3.104
Z_A_HLFB_OUT: J21.5
Z_A_MI_DIR: J21.7 R89.1 U35.3
Z_A_MI_ENABLE: J21.8 R90.1 U36.3
Z_A_MI_STEP: J21.6 R85.1 U34.3
Z_A_STEP: R86.1 U3.106
Z_B_DIR: R93.1 U3.102
Z_B_ENABLE: R94.1 U3.101
Z_B_HLFB_OUT: J22.5
Z_B_MI_DIR: J22.7 R95.1 U38.3
Z_B_MI_ENABLE: J22.8 R96.1 U39.3
Z_B_MI_STEP: J22.6 R91.1 U37.3
Z_B_STEP: R92.1 U3.103